# EAGLE board Pro Trinket Keyboard V4 (EAGLE 7.4.0)
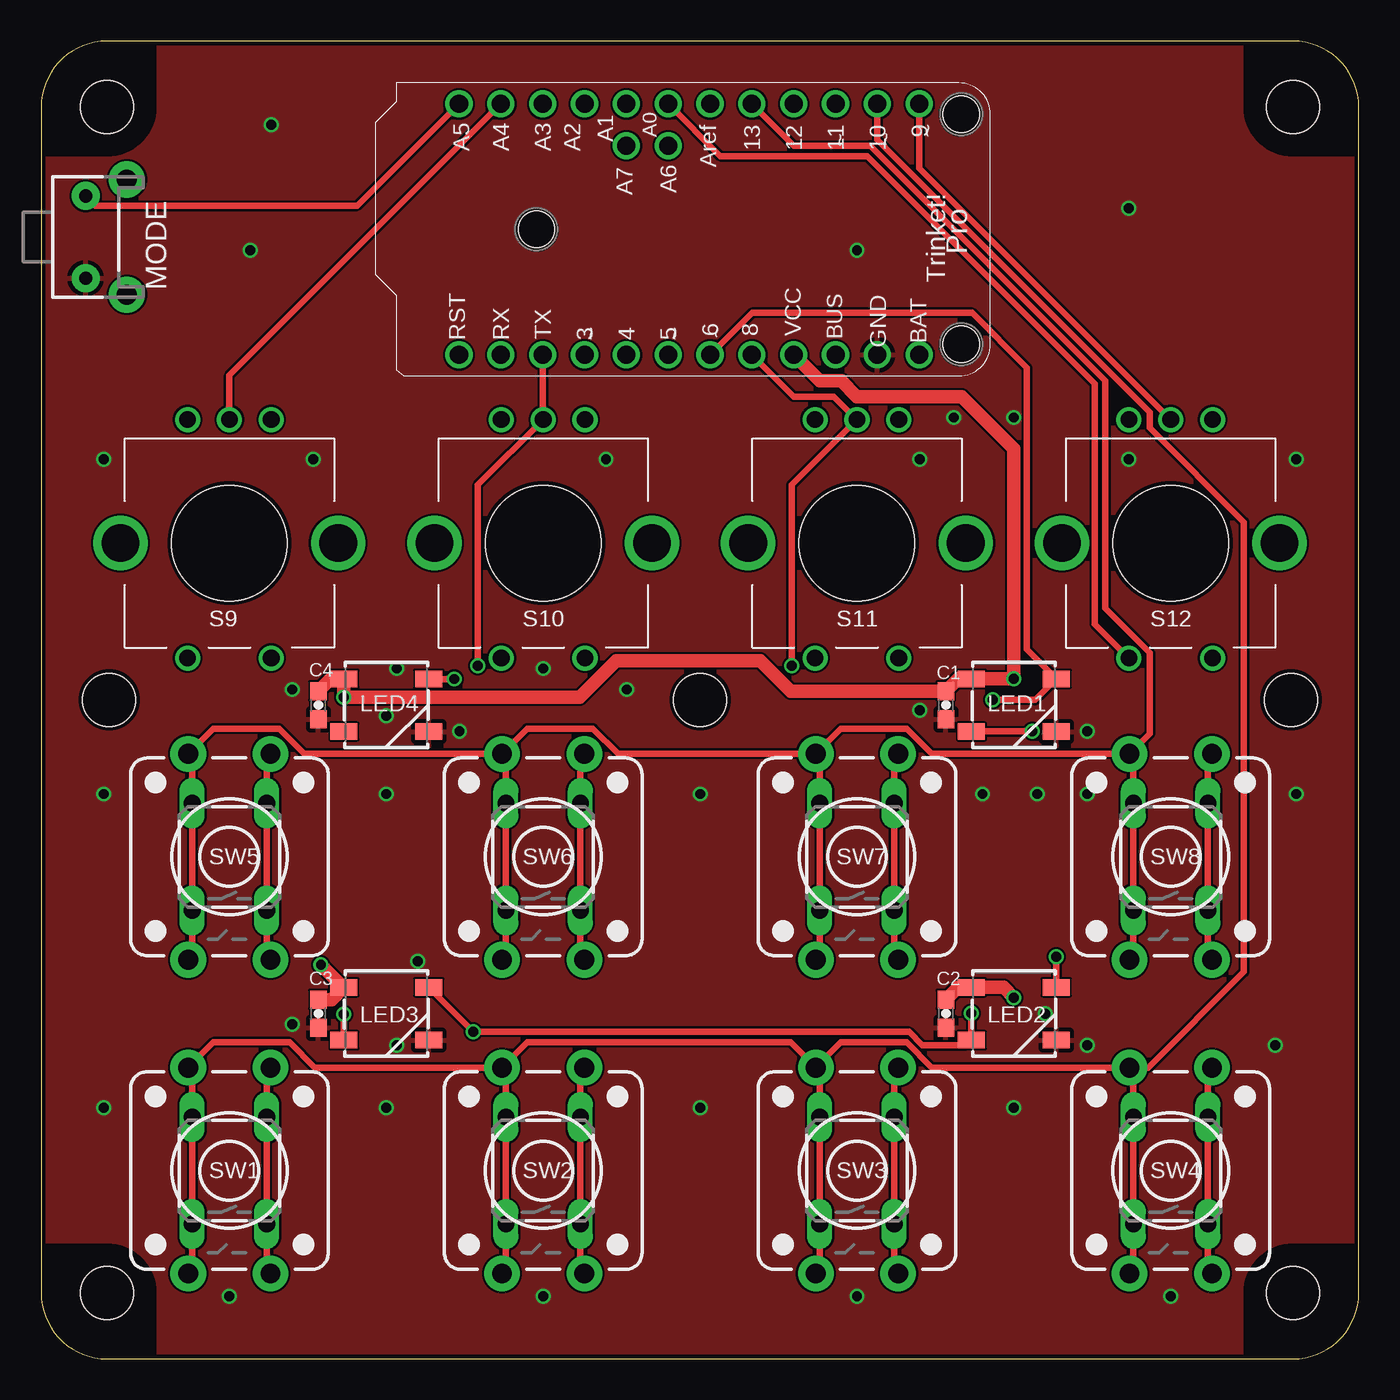
[diagram p0: board, top side]
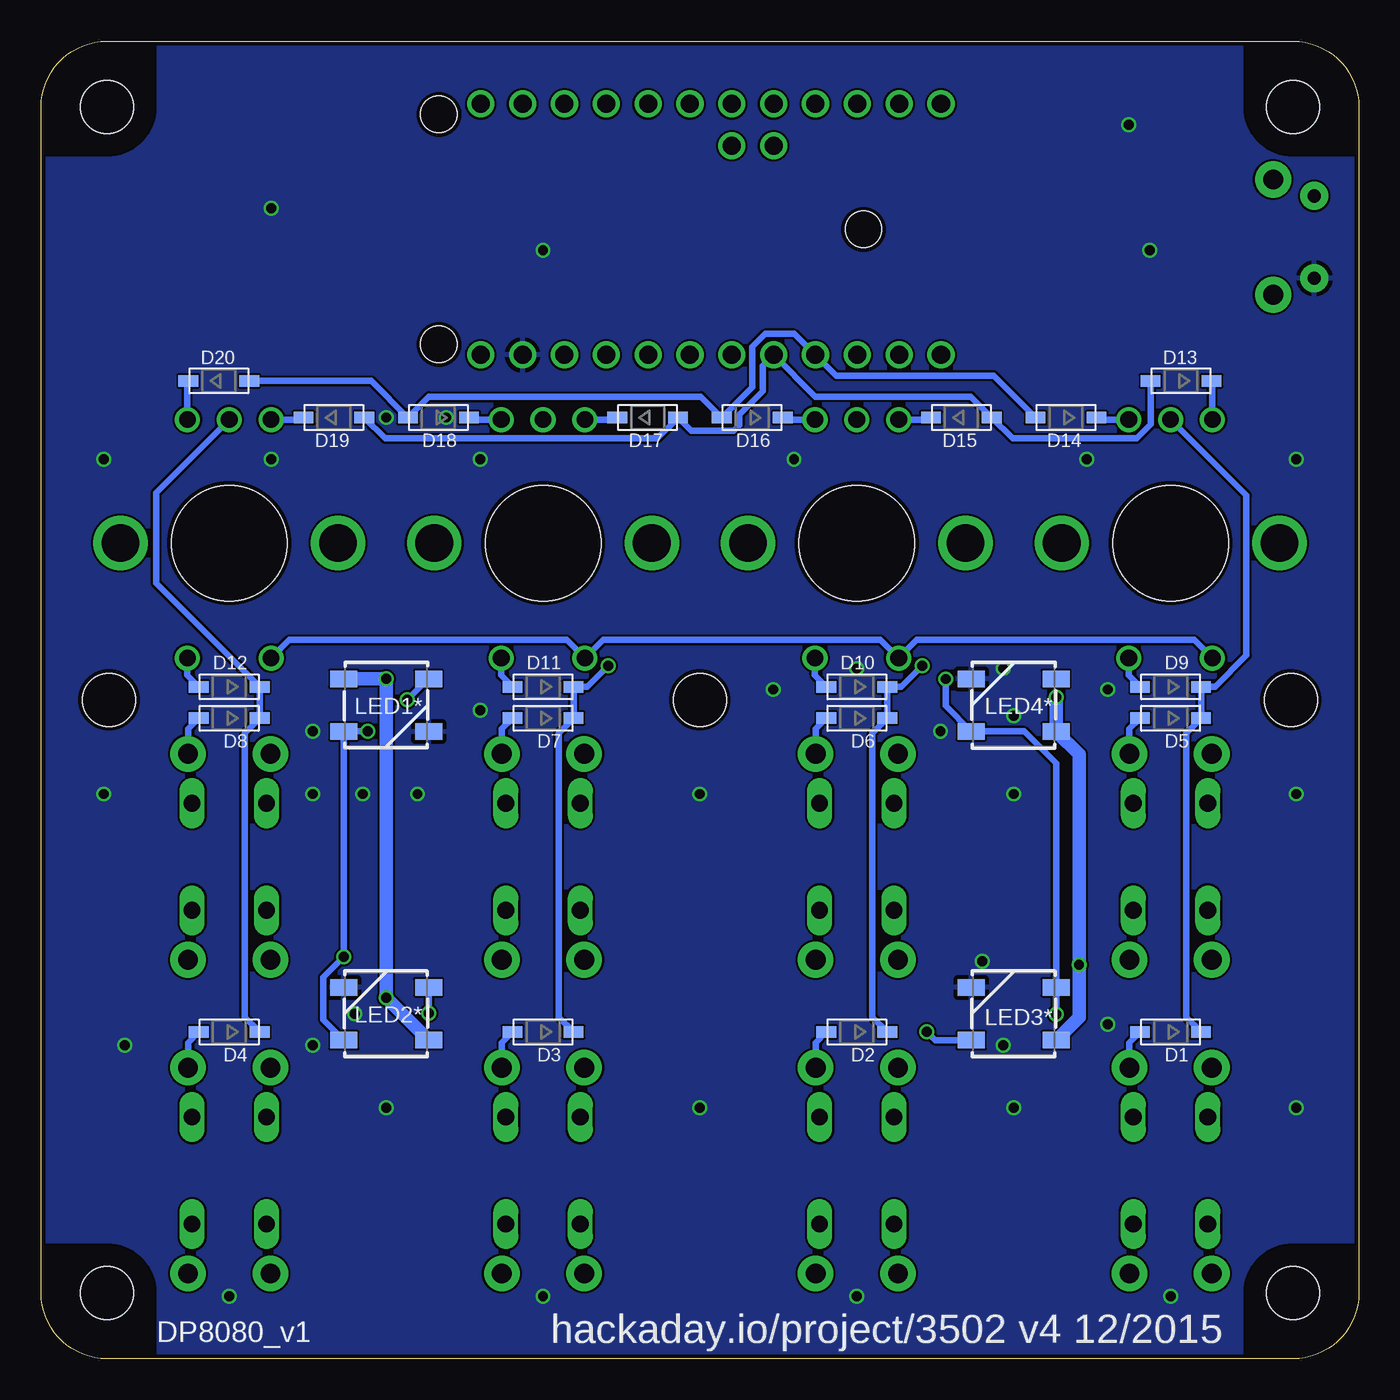
[diagram p1: board, bottom side, seen from below]

Size 80 x 80 mm. Coordinates in mm from the lower left corner, seen from the top.
Copper layers (1*16): Top 0.035mm / dielectric 1.5mm / Bottom 0.035mm
Design rules "dirt_cheap_dirty_boards.v1": minimum track width 5mil, minimum drill 12mil, track to track 5mil, track to pad 5mil, pad to pad 5mil, via to via 5mil, smd to smd 0mil, copper to edge 10mil, drill to drill 10mil, minimum pad ring 10mil, minimum via ring 6mil, stop-mask expansion 2mil, vias tented up to drill 25mil, thermal gap 10mil
Holes 7 mm at 11.43,49.53 30.48,49.53 49.53,49.53 68.58,49.53
Holes 3.2 mm at 40.01,40.01 4.13,40.01 75.88,40.01

## Footprints (pad centres in the part's own frame; a part is rotated, then mirrored left to right if it is on the bottom)
0603-CAP = smd 1.1 x 1: 1 -0.85,0; 2 0.85,0
SOD-123 = smd 1.2 x 0.7: A 1.85,0; C -1.85,0
WS2812B = smd 1.651 x 1: 1 -2.577,1.6; 2 -2.577,-1.6; 3 2.577,-1.6; 4 2.577,1.6
TACTILE-PTH-SIDEEZ = drill 0.8 pad 1.7: 1 -2.5,0; 2 2.5,0 | drill 1.2 pad 2.2: ANCHOR1 -3.5,2.5; ANCHOR2 3.5,2.5
PROTRINKET = drill 1.1: 3 7.62,2.921; 4 7.62,5.461; 5 7.62,8.001; 6 7.62,10.541; 8 7.62,13.081; 9 -7.62,23.241; 10 -7.62,20.701; 11 -7.62,18.161; 12 -7.62,15.621; 13 -7.62,13.081; A0 -7.62,8.001; A1 -7.62,5.461; A2 -7.62,2.921; A3 -7.62,0.381; A4 -7.62,-2.159; A5 -7.62,-4.699; A6 -5.08,8.001; A7 -5.08,5.461; AREF -7.62,10.541; BAT+ 7.62,23.241; GND 7.62,20.701; RST 7.62,-4.699; RX 7.62,-2.159; TX 7.62,0.381; USB 7.62,18.161; VCC 7.62,15.621 | hole 2.2: -6.985,25.781; 6.985,25.781; 0,0
TACTILE-PTH-12MM = drill 1.2 pad 2.159: 1 6.25,-2.5; 2 -6.25,-2.5; 3 6.25,2.5; 4 -6.25,2.5
TAC-SWITCH-PTH = drill 1.016 pad 1.524 long: 1 -3.251,2.261; 2 3.251,2.261; 3 -3.251,-2.261; 4 3.251,-2.261
ROTARY_ENC_PLAIN = drill 1.016: A 7.493,-2.54; B 7.493,2.54; C 7.493,0; SW+ -6.985,2.54; SW- -6.985,-2.54 | drill 2.286: P$3 0,6.604; P$4 0,-6.604
DP8080_V1 = hole 3.2: 4,4; 76,4; 76,76; 4,76

## Placement (x,y rotation side)
C1  0.1uF  [0603-CAP]  54.93,39.69 90 top
C2  0.1uF  [0603-CAP]  54.93,20.95 90 top
C3  0.1uF  [0603-CAP]  16.83,20.95 90 top
C4  0.1uF  [0603-CAP]  16.83,39.69 90 top
D1  [SOD-123]  11.43,19.84 180 bottom
D2  [SOD-123]  30.48,19.84 180 bottom
D3  [SOD-123]  49.53,19.84 180 bottom
D4  [SOD-123]  68.58,19.84 180 bottom
D5  [SOD-123]  11.43,38.89 180 bottom
D6  [SOD-123]  30.48,38.89 180 bottom
D7  [SOD-123]  49.53,38.89 180 bottom
D8  [SOD-123]  68.58,38.89 180 bottom
D9  [SOD-123]  11.43,40.8 180 bottom
D10  [SOD-123]  30.48,40.8 180 bottom
D11  [SOD-123]  49.53,40.8 180 bottom
D12  [SOD-123]  68.58,40.8 180 bottom
D13  [SOD-123]  10.79,59.37 180 bottom
D14  [SOD-123]  17.78,57.15 180 bottom
D15  [SOD-123]  24.13,57.15 0 bottom
D16  [SOD-123]  36.83,57.15 180 bottom
D17  [SOD-123]  43.18,57.15 0 bottom
D18  [SOD-123]  55.88,57.15 180 bottom
D19  [SOD-123]  62.23,57.15 0 bottom
D20  [SOD-123]  69.22,59.37 0 bottom
LED1  [WS2812B]  59.05,39.69 0 top
LED1*  [WS2812B]  59.05,39.69 0 bottom
LED2  [WS2812B]  59.05,20.95 0 top
LED2*  [WS2812B]  59.05,20.95 180 bottom
LED3  [WS2812B]  20.95,20.95 0 top
LED3*  [WS2812B]  20.95,20.95 180 bottom
LED4  [WS2812B]  20.95,39.69 0 top
LED4*  [WS2812B]  20.95,39.69 180 bottom
MODE  [TACTILE-PTH-SIDEEZ]  2.7,68.1 270 top
PRO_TRINKET  PRO_TRINKET  [PROTRINKET]  30.07,68.57 270 top
S1  [TACTILE-PTH-12MM]  11.43,11.43 270 top
S1*  [TAC-SWITCH-PTH]  11.43,11.43 90 top
S2  [TACTILE-PTH-12MM]  30.48,11.43 270 top
S2*  [TAC-SWITCH-PTH]  30.48,11.43 90 top
S3  [TACTILE-PTH-12MM]  49.53,11.43 270 top
S3*  [TAC-SWITCH-PTH]  49.53,11.43 90 top
S4  [TACTILE-PTH-12MM]  68.58,11.43 270 top
S4*  [TAC-SWITCH-PTH]  68.58,11.43 90 top
S5  [TACTILE-PTH-12MM]  11.43,30.48 270 top
S5*  [TAC-SWITCH-PTH]  11.43,30.48 90 top
S6  [TACTILE-PTH-12MM]  30.48,30.48 270 top
S6*  [TAC-SWITCH-PTH]  30.48,30.48 90 top
S7  [TACTILE-PTH-12MM]  49.53,30.48 270 top
S7*  [TAC-SWITCH-PTH]  49.53,30.48 90 top
S8  [TACTILE-PTH-12MM]  68.58,30.48 270 top
S8*  [TAC-SWITCH-PTH]  68.58,30.48 90 top
S9  ROTARTY_ENCODER  [ROTARY_ENC_PLAIN]  11.43,49.53 90 top
S10  ROTARTY_ENCODER  [ROTARY_ENC_PLAIN]  30.48,49.53 90 top
S11  ROTARTY_ENCODER  [ROTARY_ENC_PLAIN]  49.53,49.53 90 top
S12  ROTARTY_ENCODER  [ROTARY_ENC_PLAIN]  68.58,49.53 90 top
U$1  [DP8080_V1]  0,0 0 top

## Library data of the parts
C1-C4 = SparkFun-Capacitors; PROD_ID: CAP-07876
D1-D20 PRO_TRINKET = adafruit
LED1 LED1* LED2 LED2* LED3 LED3* LED4 LED4* = SparkFun-LED
MODE S9-S12 = SparkFun-Electromechanical
S1-S8 = SparkFun-Electromechanical; PROD_ID: SWCH-09185
S1* S2* S3* S4* S5* S6* S7* S8* = GeekAmmo
U$1 = dp_pcb

## Nets
A6: PRO_TRINKET.A6
A7: PRO_TRINKET.A7
BAT+: PRO_TRINKET.BAT+
D0: PRO_TRINKET.RX
D1: D2.C D6.C D10.C PRO_TRINKET.TX S10.C
D3: D14.A D16.A D18.A D20.A PRO_TRINKET.3
D4: D13.A D15.A D17.A D19.A PRO_TRINKET.4
D5: PRO_TRINKET.5
D6: LED1*.4 LED1.4 PRO_TRINKET.6
D8: D3.C D7.C D11.C PRO_TRINKET.8 S11.C
D9: D4.C D8.C D12.C PRO_TRINKET.9 S12.C
D10: PRO_TRINKET.10 S1*.1 S1*.2 S1.1 S1.2 S2*.1 S2*.2 S2.1 S2.2 S3*.1 S3*.2 S3.1 S3.2 S4*.1 S4*.2 S4.1 S4.2
D13: PRO_TRINKET.13 S5*.1 S5*.2 S5.1 S5.2 S6*.1 S6*.2 S6.1 S6.2 S7*.1 S7*.2 S7.1 S7.2 S8*.1 S8*.2 S8.1 S8.2
D14: PRO_TRINKET.A0 S9.SW+ S10.SW+ S11.SW+ S12.SW+
D15: PRO_TRINKET.A1
D16: PRO_TRINKET.A2
D17: PRO_TRINKET.A3
D18: D1.C D5.C D9.C PRO_TRINKET.A4 S9.C
D19: MODE.1 PRO_TRINKET.A5
GND: C1.1 C2.1 C3.1 C4.1 LED1*.3 LED1.3 LED2*.3 LED2.3 LED3*.3 LED3.3 LED4*.3 LED4.3 MODE.2 PRO_TRINKET.GND
L1NODE: LED1*.2 LED1.2 LED2*.4 LED2.4
L2NODE: LED2*.2 LED2.2 LED3*.4 LED3.4
L3NODE: LED3*.2 LED3.2 LED4*.4 LED4.4
N$34: D10.A S10.SW-
N$35: D9.A S9.SW-
N$36: D11.A S11.SW-
N$37: D20.C S12.A
N$38: D19.C S12.B
N$39: D18.C S11.A
N$40: D12.A S12.SW-
N$41: D16.C S10.A
N$42: D15.C S10.B
N$43: D14.C S9.A
N$44: D13.C S9.B
N$45: D17.C S11.B
S1NODE: D1.A S1*.3 S1*.4 S1.3 S1.4
S2NODE: D2.A S2*.3 S2*.4 S2.3 S2.4
S3NODE: D3.A S3*.3 S3*.4 S3.3 S3.4
S4NODE: D4.A S4*.3 S4*.4 S4.3 S4.4
S5NODE: D5.A S5*.3 S5*.4 S5.3 S5.4
S6NODE: D6.A S6*.3 S6*.4 S6.3 S6.4
S7NODE: D7.A S7*.3 S7*.4 S7.3 S7.4
S8NODE: D8.A S8*.3 S8*.4 S8.3 S8.4
USB: PRO_TRINKET.USB
VCC: C1.2 C2.2 C3.2 C4.2 LED1*.1 LED1.1 LED2*.1 LED2.1 LED3*.1 LED3.1 LED4*.1 LED4.1 PRO_TRINKET.VCC

## Tracks (layer width: path | path; a pad name or v marks a point on that pad's centre or on a via)
D1  (via drill 0.6)
  Top 0.406: v26.51,42.07 26.51,53.05 S10.C 30.45,57.05 PRO_TRINKET.TX
  Bottom 0.406: D2.C 29.53,20.74 29.53,38 D6.C D10.C 27.78,40.8 v26.51,42.07
D3
  Bottom 0.406: D20.A 59.95,59.37 D18.A 56.46,58.42 39.95,58.42 D16.A 36.83,59 36.83,61.44 36.04,62.23 34.29,62.23 33.01,60.95 PRO_TRINKET.3 31.73,59.69 22.17,59.69 D14.A
D4
  Bottom 0.406: D19.A 59.11,55.88 42.6,55.88 D17.A 40.54,56.36 37.94,56.36 37.62,56.67 37.62,57.31 36.2,58.74 36.2,60.29 PRO_TRINKET.4 33,58.42 23.55,58.42 D15.A 21.01,55.88 13.49,55.88 12.64,56.73 D13.A
D6  (via drill 0.6)
  Top 0.406: v57.78,40.01 60.35,40.01 LED1.4 59.85,43.07 59.85,60.17 56.52,63.5 43.16,63.5 PRO_TRINKET.6
  Bottom 0.406: v57.78,40.01 56.5,41.29 LED1*.4
D8  (via drill 0.6)
  Top 0.406: v45.56,42.07 45.56,53.05 S11.C 48.13,58.42 45.69,58.42 PRO_TRINKET.8
  Bottom 0.406: D3.C 48.58,20.74 48.58,38 D7.C D11.C 46.83,40.8 v45.56,42.07
D9
  Top 0.406: PRO_TRINKET.9 53.31,72.29 S12.C
  Bottom 0.406: D4.C 67.63,20.74 67.63,38 D8.C D12.C 73.03,47.09 73.03,52.58 S12.C
D10
  Top 0.406: S2.1 28.22,5.42 S2*.1 S2*.2 28.22,17.44 S2.2 | S3.1 47.27,5.42 S3*.1 S3*.2 47.27,17.44 S3.2 | S4.1 66.32,5.42 S4*.1 S4*.2 66.32,17.44 S4.2 | S4.2 54.08,17.68 52.55,19.21 48.56,19.21 S3.2 | S3.2 45.5,19.21 29.51,19.21 S2.2 | S2.2 16.61,17.68 15.08,19.21 10.46,19.21 S1.2 9.17,17.44 S1*.2 S1*.1 9.17,5.42 S1.1 | PRO_TRINKET.10 50.77,74.01 67.31,57.47 67.31,56.52 73.03,50.8 73.03,23.5 67.21,17.68 S4.2
D13
  Top 0.406: S8.2 66.32,36.49 S8*.2 S8*.1 66.32,24.47 S8.1 | S7.2 47.27,36.49 S7*.2 S7*.1 47.27,24.47 S7.1 | S6.2 28.22,36.49 S6*.2 S6*.1 28.22,24.47 S6.1 | S5.1 9.17,24.47 S5*.1 S5*.2 9.17,36.49 S5.2 10.46,38.26 14.45,38.26 15.97,36.73 S6.2 | S8.2 54.08,36.73 52.55,38.26 48.56,38.26 S7.2 | S7.2 35.02,36.73 33.5,38.26 29.51,38.26 S6.2 | PRO_TRINKET.13 45.69,73.66 50.32,73.66 64.61,59.37 64.61,45.56 67.31,42.86 67.31,37.96 S8.2
D14
  Top 0.406: PRO_TRINKET.A0 41.24,73.03 50.16,73.03 63.98,59.21 63.98,44.61 S12.SW+
  Bottom 0.406: S12.SW+ 64.93,43.66 48.1,43.66 S11.SW+ 45.88,43.66 29.05,43.66 S10.SW+ 26.83,43.66 10,43.66 S9.SW+
D18
  Top 0.406: S9.C 11.43,59.71 PRO_TRINKET.A4
  Bottom 0.406: D1.C 10.48,20.74 10.48,38 D5.C D9.C 8.73,40.8 6.83,42.7 6.83,52.42 S9.C
D19
  Top 0.406: MODE.1 3.29,70.01 19.19,70.01 PRO_TRINKET.A5
GND  (via drill 0.6)
  other vias: 53.34,54.61 59.05,57.15 55.4,57.15 66.04,54.61 34.29,54.61 16.51,54.61 12.7,67.31 13.97,74.93 49.53,67.31 66.04,69.85 3.81,54.61 76.2,54.61 35.56,40.64 15.24,40.64 21.59,41.91 25.4,38.1 20.95,34.29 40.01,34.29 57.15,34.29 60.48,34.29 63.5,34.29 63.5,38.1 53.34,39.37 76.2,34.29 63.5,19.05 60.96,20.95 74.93,19.05 59.05,15.24 40.01,15.24 20.95,15.24 68.58,3.81 49.53,3.81 30.48,3.81 11.43,3.81 3.81,15.24 3.81,34.29 21.59,19.05 15.24,20.32 22.86,24.13 20.95,39.05 30.48,41.91
  pour Bottom (rank 6): 0,80.01 80.01,80.01 80.01,0 0,0
  pour Top: 0,80.01 80.01,80.01 80.01,0 0,0
L1NODE  (via drill 0.6)
  Top 0.406: LED1.2 v60.17,38.1 | v61.63,24.41 LED2.4
  Bottom 0.406: v60.17,38.1 LED1*.2 v61.63,24.41 62.87,23.18 62.87,20.59 LED2*.4
L2NODE  (via drill 0.6)
  Top 0.406: v56.48,20.99 LED2.2 56.17,19.05 53.5,19.05 52.69,19.86 v26.23,19.86 LED3.4
  Bottom 0.406: LED2*.2 v56.48,20.99 | v26.23,19.86 25.73,19.36 LED3*.4
L3NODE  (via drill 0.6)
  Top 0.406: LED3.2 v18.38,20.92 | v25.08,41.27 23.54,41.27 LED4.4
  Bottom 0.406: v18.38,20.92 LED3*.2 18.38,36.16 20.32,38.1 LED4*.4 25.08,39.64 v25.08,41.27
N$34
  Bottom 0.406: D10.A 33.02,41.49 S10.SW-
N$35
  Bottom 0.406: D9.A 13.97,41.49 S9.SW-
N$36
  Bottom 0.406: D11.A 52.07,41.49 S11.SW-
N$37
  Bottom 0.406: S12.A 71.12,59.32 D20.C
N$38
  Bottom 0.406: S12.B 64.21,57.02 D19.C
N$39
  Bottom 0.406: S11.A 53.9,57.02 D18.C
N$40
  Bottom 0.406: D12.A 71.12,41.49 S12.SW-
N$41
  Bottom 0.406: S10.A 34.85,57.02 D16.C
N$42
  Bottom 0.406: S10.B 26.11,57.02 D15.C
N$43
  Bottom 0.406: S9.A 15.8,57.02 D14.C
N$44
  Bottom 0.406: S9.B 8.89,59.32 D13.C
N$45
  Bottom 0.406: S11.B 45.16,57.02 D17.C
S1NODE
  Top 0.406: S1.3 13.69,5.42 S1*.3 S1*.4 13.69,17.44 S1.4
  Bottom 0.406: D1.A 13.93,19.19 S1.4
S2NODE
  Top 0.406: S2.3 32.74,5.42 S2*.3 S2*.4 32.74,17.44 S2.4
  Bottom 0.406: D2.A 32.98,19.19 S2.4
S3NODE
  Top 0.406: S3.3 51.79,5.42 S3*.3 S3*.4 51.79,17.44 S3.4
  Bottom 0.406: D3.A 52.03,19.19 S3.4
S4NODE
  Top 0.406: S4.3 70.84,5.42 S4*.3 S4*.4 70.84,17.44 S4.4
  Bottom 0.406: D4.A 71.08,19.19 S4.4
S5NODE
  Top 0.406: S5.3 13.69,24.47 S5*.3 S5*.4 13.69,36.49 S5.4
  Bottom 0.406: D5.A 13.93,38.24 S5.4
S6NODE
  Top 0.406: S6.3 32.74,24.47 S6*.3 S6*.4 32.74,36.49 S6.4
  Bottom 0.406: D6.A 32.98,38.24 S6.4
S7NODE
  Top 0.406: S7.3 51.79,24.47 S7*.3 S7*.4 51.79,36.49 S7.4
  Bottom 0.406: D7.A 52.03,38.24 S7.4
S8NODE
  Top 0.406: S8.3 70.84,24.47 S8*.3 S8*.4 70.84,36.49 S8.4
  Bottom 0.406: D8.A 71.08,38.24 S8.4
VCC  (via drill 0.6)
  Top 0.813: PRO_TRINKET.VCC 47.27,59.37 48.58,59.37 49.53,58.42 55.88,58.42 59.05,55.24 v59.05,41.29 LED1.1 55.68,41.29 C1.2 45.51,40.54 43.66,42.39 34.92,42.39 32.7,40.16 v18.38,40.16 LED4.1 17.58,41.29 C4.2 | C2.2 55.68,22.55 LED2.1 58.43,22.55 v59.05,21.93 | v16.99,23.92 18.35,22.55 LED3.1 17.63,21.8 C3.2
  Bottom 0.813: LED1*.1 v59.05,41.29 v59.05,21.93 LED2*.1 | v18.38,40.16 LED4*.1 16.99,36.7 v16.99,23.92 16.99,20.75 LED3*.1

## Text on the board
tNames: SW5 | SW6 | SW7 | SW8 | SW1 | SW2 | SW3 | SW4
bNames: hackaday.io/project/3502 v4 12/2015